# EAGLE board sparkfun-mlx90640-qwiic-breakout-Panel (EAGLE 9.0.1)
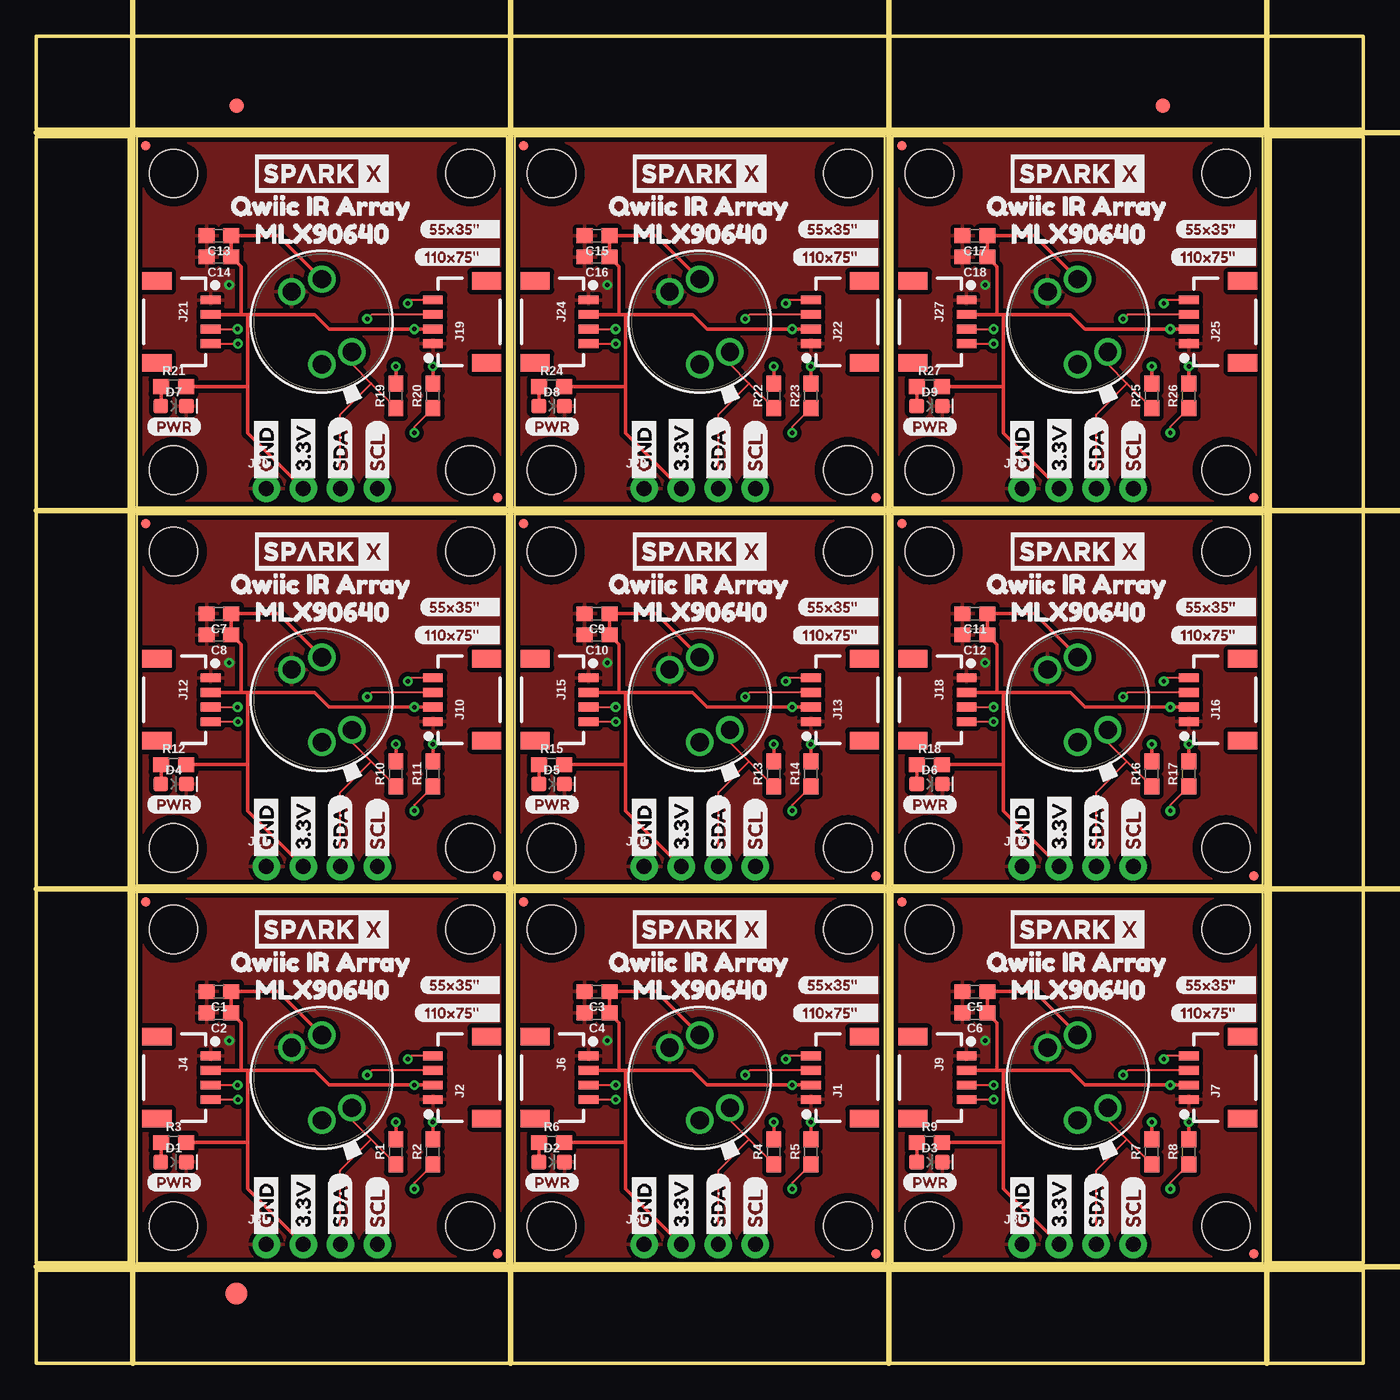
[diagram p0: board, top side]
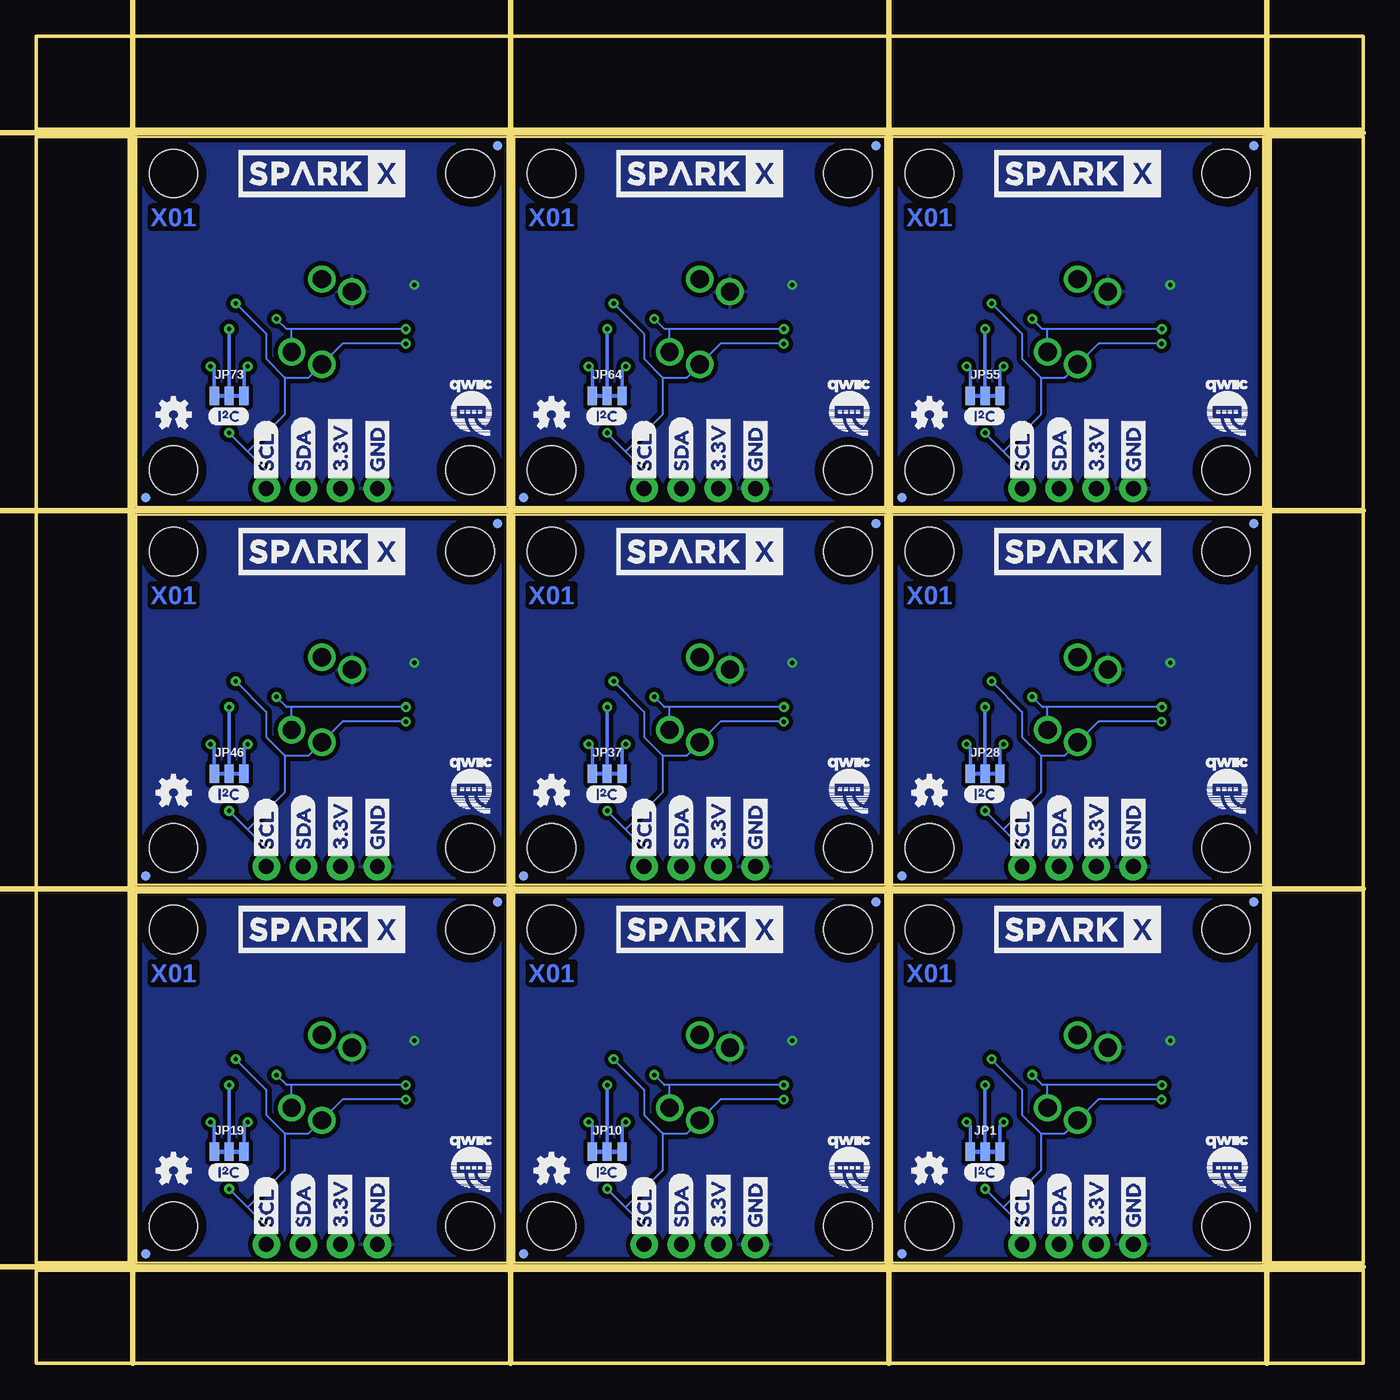
[diagram p1: board, bottom side, seen from below]

Size 90.93 x 90.93 mm. Coordinates in mm from the lower left corner, seen from the top.
Outline: 6.86,6.86 32.26,6.86 32.26,32.26 6.86,32.26 6.86,6.86
Outline: 32.77,6.86 58.17,6.86 58.17,32.26 32.77,32.26 32.77,6.86
Outline: 58.67,6.86 84.07,6.86 84.07,32.26 58.67,32.26 58.67,6.86
Outline: 6.86,32.77 32.26,32.77 32.26,58.17 6.86,58.17 6.86,32.77
Outline: 32.77,32.77 58.17,32.77 58.17,58.17 32.77,58.17 32.77,32.77
Outline: 58.67,32.77 84.07,32.77 84.07,58.17 58.67,58.17 58.67,32.77
Outline: 6.86,58.67 32.26,58.67 32.26,84.07 6.86,84.07 6.86,58.67
Outline: 32.77,58.67 58.17,58.67 58.17,84.07 32.77,84.07 32.77,58.67
Outline: 58.67,58.67 84.07,58.67 84.07,84.07 58.67,84.07 58.67,58.67
Outline: 0,6.35 90.93,6.35 90.93,0 0,0 0,6.35
Outline: 84.58,84.07 90.93,84.07 90.93,6.86 84.58,6.86 84.58,84.07
Outline: 0,90.93 90.93,90.93 90.93,84.58 0,84.58 0,90.93
Outline: 0,84.07 6.35,84.07 6.35,6.86 0,6.86 0,84.07
Copper layers (1*16): Top 0.035mm / dielectric 1.5mm / Bottom 0.035mm
Design rules "SparkFun-2-layer-PCBWay-LIMIT": minimum track width 6mil, minimum drill 0.3mm, track to track 6mil, track to pad 6mil, pad to pad 6mil, via to via 6mil, smd to smd 6mil, copper to edge 6mil, drill to drill 6mil, minimum pad ring 7mil, minimum via ring 7mil, stop-mask expansion 4mil, vias tented up to drill 25mil, thermal gap 10mil
Milling: 8 lines

## Footprints (pad centres in the part's own frame; a part is rotated, then mirrored left to right if it is on the bottom)
0603 = smd 1.1 x 1: 1 -0.85,0; 2 0.85,0
LED-0603 = smd 1 x 1: A -0.877,0; C 0.877,0
FIDUCIAL-1X2 = smd 1 x 1: 1 0,0
FIDUCIAL-1.5X3 = smd 1.5 x 1.5: 1 0,0
1X04_1MM_RA = smd 0.6 x 1.35: 1 -1.5,0; 2 -0.5,0; 3 0.5,0; 4 1.5,0 | smd 1.2 x 2: NC1 2.8,-3.675; NC2 -2.8,-3.675
1X04_NO_SILK = drill 1.016 pad 1.88: 1 0,0; 2 2.54,0; 3 5.08,0; 4 7.62,0
SMT-JUMPER_3_2-NC_TRACE_NO-SILK = smd 0.635 x 1.27: 1 -1.016,0; 2 0,0; 3 1.016,0
MICRO-FIDUCIAL = smd 0.635 x 0.635: 1 0,0
STAND-OFF = hole 3.302: 0,0
MLX90640 = drill 1.25: GND 2.065,2.065; SCL -2.92,0; SDA -2.065,-2.065; VDD 2.92,0

## Placement (x,y rotation side)
C1  0.1uF  [0603]  12.51,25.46 180 top
C2  1.0uF  [0603]  12.51,24 180 top
C3  0.1uF  [0603]  38.42,25.46 180 top
C4  1.0uF  [0603]  38.42,24 180 top
C5  0.1uF  [0603]  64.33,25.46 180 top
C6  1.0uF  [0603]  64.33,24 180 top
C7  0.1uF  [0603]  12.51,51.37 180 top
C8  1.0uF  [0603]  12.51,49.91 180 top
C9  0.1uF  [0603]  38.42,51.37 180 top
C10  1.0uF  [0603]  38.42,49.91 180 top
C11  0.1uF  [0603]  64.33,51.37 180 top
C12  1.0uF  [0603]  64.33,49.91 180 top
C13  0.1uF  [0603]  12.51,77.28 180 top
C14  1.0uF  [0603]  12.51,75.82 180 top
C15  0.1uF  [0603]  38.42,77.28 180 top
C16  1.0uF  [0603]  38.42,75.82 180 top
C17  0.1uF  [0603]  64.33,77.28 180 top
C18  1.0uF  [0603]  64.33,75.82 180 top
D1  RED  [LED-0603]  9.4,13.78 0 top
D2  RED  [LED-0603]  35.31,13.78 0 top
D3  RED  [LED-0603]  61.21,13.78 0 top
D4  RED  [LED-0603]  9.4,39.69 0 top
D5  RED  [LED-0603]  35.31,39.69 0 top
D6  RED  [LED-0603]  61.21,39.69 0 top
D7  RED  [LED-0603]  9.4,65.6 0 top
D8  RED  [LED-0603]  35.31,65.6 0 top
D9  RED  [LED-0603]  61.21,65.6 0 top
E$1  [FIDUCIAL-1X2]  13.72,86.17 0 top
E$2  [FIDUCIAL-1X2]  77.22,86.17 0 top
E$3  [FIDUCIAL-1.5X3]  13.72,4.76 0 top
J1  SMD  [1X04_1MM_RA]  53.09,19.56 90 top
J2  SMD  [1X04_1MM_RA]  27.18,19.56 90 top
J3  PTH  [1X04_NO_SILK]  15.75,8.13 0 top
J4  SMD  [1X04_1MM_RA]  11.94,19.56 270 top
J5  PTH  [1X04_NO_SILK]  41.66,8.13 0 top
J6  SMD  [1X04_1MM_RA]  37.85,19.56 270 top
J7  SMD  [1X04_1MM_RA]  78.99,19.56 90 top
J8  PTH  [1X04_NO_SILK]  67.56,8.13 0 top
J9  SMD  [1X04_1MM_RA]  63.75,19.56 270 top
J10  SMD  [1X04_1MM_RA]  27.18,45.47 90 top
J11  PTH  [1X04_NO_SILK]  15.75,34.04 0 top
J12  SMD  [1X04_1MM_RA]  11.94,45.47 270 top
J13  SMD  [1X04_1MM_RA]  53.09,45.47 90 top
J14  PTH  [1X04_NO_SILK]  41.66,34.04 0 top
J15  SMD  [1X04_1MM_RA]  37.85,45.47 270 top
J16  SMD  [1X04_1MM_RA]  78.99,45.47 90 top
J17  PTH  [1X04_NO_SILK]  67.56,34.04 0 top
J18  SMD  [1X04_1MM_RA]  63.75,45.47 270 top
J19  SMD  [1X04_1MM_RA]  27.18,71.37 90 top
J20  PTH  [1X04_NO_SILK]  15.75,59.94 0 top
J21  SMD  [1X04_1MM_RA]  11.94,71.37 270 top
J22  SMD  [1X04_1MM_RA]  53.09,71.37 90 top
J23  PTH  [1X04_NO_SILK]  41.66,59.94 0 top
J24  SMD  [1X04_1MM_RA]  37.85,71.37 270 top
J25  SMD  [1X04_1MM_RA]  78.99,71.37 90 top
J26  PTH  [1X04_NO_SILK]  67.56,59.94 0 top
J27  SMD  [1X04_1MM_RA]  63.75,71.37 270 top
JP1  I2C  [SMT-JUMPER_3_2-NC_TRACE_NO-SILK]  25.91,14.48 0 bottom
JP2  FIDUCIALUFIDUCIAL  [MICRO-FIDUCIAL]  31.62,7.49 0 top
JP3  STAND-OFF  [STAND-OFF]  9.4,29.72 0 top
JP4  STAND-OFF  [STAND-OFF]  29.72,29.72 0 top
JP5  FIDUCIALUFIDUCIAL  [MICRO-FIDUCIAL]  7.49,31.62 0 top
JP6  FIDUCIALUFIDUCIAL  [MICRO-FIDUCIAL]  31.62,7.49 0 bottom
JP7  FIDUCIALUFIDUCIAL  [MICRO-FIDUCIAL]  7.49,31.62 0 bottom
JP8  STAND-OFF  [STAND-OFF]  9.4,9.4 0 top
JP9  STAND-OFF  [STAND-OFF]  29.72,9.4 0 top
JP10  I2C  [SMT-JUMPER_3_2-NC_TRACE_NO-SILK]  51.82,14.48 0 bottom
JP11  STAND-OFF  [STAND-OFF]  35.31,29.72 0 top
JP12  STAND-OFF  [STAND-OFF]  55.63,29.72 0 top
JP13  FIDUCIALUFIDUCIAL  [MICRO-FIDUCIAL]  57.53,7.49 0 top
JP14  FIDUCIALUFIDUCIAL  [MICRO-FIDUCIAL]  57.53,7.49 0 bottom
JP15  FIDUCIALUFIDUCIAL  [MICRO-FIDUCIAL]  33.4,31.62 0 top
JP16  FIDUCIALUFIDUCIAL  [MICRO-FIDUCIAL]  33.4,31.62 0 bottom
JP17  STAND-OFF  [STAND-OFF]  35.31,9.4 0 top
JP18  STAND-OFF  [STAND-OFF]  55.63,9.4 0 top
JP19  I2C  [SMT-JUMPER_3_2-NC_TRACE_NO-SILK]  77.72,14.48 0 bottom
JP20  STAND-OFF  [STAND-OFF]  61.21,29.72 0 top
JP21  STAND-OFF  [STAND-OFF]  81.53,29.72 0 top
JP22  FIDUCIALUFIDUCIAL  [MICRO-FIDUCIAL]  83.44,7.49 0 top
JP23  FIDUCIALUFIDUCIAL  [MICRO-FIDUCIAL]  83.44,7.49 0 bottom
JP24  FIDUCIALUFIDUCIAL  [MICRO-FIDUCIAL]  59.31,31.62 0 top
JP25  FIDUCIALUFIDUCIAL  [MICRO-FIDUCIAL]  59.31,31.62 0 bottom
JP26  STAND-OFF  [STAND-OFF]  61.21,9.4 0 top
JP27  STAND-OFF  [STAND-OFF]  81.53,9.4 0 top
JP28  I2C  [SMT-JUMPER_3_2-NC_TRACE_NO-SILK]  25.91,40.39 0 bottom
JP29  STAND-OFF  [STAND-OFF]  9.4,55.63 0 top
JP30  STAND-OFF  [STAND-OFF]  29.72,55.63 0 top
JP31  FIDUCIALUFIDUCIAL  [MICRO-FIDUCIAL]  31.62,33.4 0 top
JP32  FIDUCIALUFIDUCIAL  [MICRO-FIDUCIAL]  31.62,33.4 0 bottom
JP33  FIDUCIALUFIDUCIAL  [MICRO-FIDUCIAL]  7.49,57.53 0 top
JP34  FIDUCIALUFIDUCIAL  [MICRO-FIDUCIAL]  7.49,57.53 0 bottom
JP35  STAND-OFF  [STAND-OFF]  9.4,35.31 0 top
JP36  STAND-OFF  [STAND-OFF]  29.72,35.31 0 top
JP37  I2C  [SMT-JUMPER_3_2-NC_TRACE_NO-SILK]  51.82,40.39 0 bottom
JP38  STAND-OFF  [STAND-OFF]  35.31,55.63 0 top
JP39  STAND-OFF  [STAND-OFF]  55.63,55.63 0 top
JP40  FIDUCIALUFIDUCIAL  [MICRO-FIDUCIAL]  57.53,33.4 0 top
JP41  FIDUCIALUFIDUCIAL  [MICRO-FIDUCIAL]  57.53,33.4 0 bottom
JP42  FIDUCIALUFIDUCIAL  [MICRO-FIDUCIAL]  33.4,57.53 0 top
JP43  FIDUCIALUFIDUCIAL  [MICRO-FIDUCIAL]  33.4,57.53 0 bottom
JP44  STAND-OFF  [STAND-OFF]  35.31,35.31 0 top
JP45  STAND-OFF  [STAND-OFF]  55.63,35.31 0 top
JP46  I2C  [SMT-JUMPER_3_2-NC_TRACE_NO-SILK]  77.72,40.39 0 bottom
JP47  STAND-OFF  [STAND-OFF]  61.21,55.63 0 top
JP48  STAND-OFF  [STAND-OFF]  81.53,55.63 0 top
JP49  FIDUCIALUFIDUCIAL  [MICRO-FIDUCIAL]  83.44,33.4 0 top
JP50  FIDUCIALUFIDUCIAL  [MICRO-FIDUCIAL]  83.44,33.4 0 bottom
JP51  FIDUCIALUFIDUCIAL  [MICRO-FIDUCIAL]  59.31,57.53 0 top
JP52  FIDUCIALUFIDUCIAL  [MICRO-FIDUCIAL]  59.31,57.53 0 bottom
JP53  STAND-OFF  [STAND-OFF]  61.21,35.31 0 top
JP54  STAND-OFF  [STAND-OFF]  81.53,35.31 0 top
JP55  I2C  [SMT-JUMPER_3_2-NC_TRACE_NO-SILK]  25.91,66.29 0 bottom
JP56  STAND-OFF  [STAND-OFF]  9.4,81.53 0 top
JP57  STAND-OFF  [STAND-OFF]  29.72,81.53 0 top
JP58  FIDUCIALUFIDUCIAL  [MICRO-FIDUCIAL]  31.62,59.31 0 top
JP59  FIDUCIALUFIDUCIAL  [MICRO-FIDUCIAL]  31.62,59.31 0 bottom
JP60  FIDUCIALUFIDUCIAL  [MICRO-FIDUCIAL]  7.49,83.44 0 top
JP61  FIDUCIALUFIDUCIAL  [MICRO-FIDUCIAL]  7.49,83.44 0 bottom
JP62  STAND-OFF  [STAND-OFF]  9.4,61.21 0 top
JP63  STAND-OFF  [STAND-OFF]  29.72,61.21 0 top
JP64  I2C  [SMT-JUMPER_3_2-NC_TRACE_NO-SILK]  51.82,66.29 0 bottom
JP65  STAND-OFF  [STAND-OFF]  35.31,81.53 0 top
JP66  STAND-OFF  [STAND-OFF]  55.63,81.53 0 top
JP67  FIDUCIALUFIDUCIAL  [MICRO-FIDUCIAL]  57.53,59.31 0 top
JP68  FIDUCIALUFIDUCIAL  [MICRO-FIDUCIAL]  57.53,59.31 0 bottom
JP69  FIDUCIALUFIDUCIAL  [MICRO-FIDUCIAL]  33.4,83.44 0 top
JP70  FIDUCIALUFIDUCIAL  [MICRO-FIDUCIAL]  33.4,83.44 0 bottom
JP71  STAND-OFF  [STAND-OFF]  35.31,61.21 0 top
JP72  STAND-OFF  [STAND-OFF]  55.63,61.21 0 top
JP73  I2C  [SMT-JUMPER_3_2-NC_TRACE_NO-SILK]  77.72,66.29 0 bottom
JP74  STAND-OFF  [STAND-OFF]  61.21,81.53 0 top
JP75  STAND-OFF  [STAND-OFF]  81.53,81.53 0 top
JP76  FIDUCIALUFIDUCIAL  [MICRO-FIDUCIAL]  83.44,59.31 0 top
JP77  FIDUCIALUFIDUCIAL  [MICRO-FIDUCIAL]  83.44,59.31 0 bottom
JP78  FIDUCIALUFIDUCIAL  [MICRO-FIDUCIAL]  59.31,83.44 0 top
JP79  FIDUCIALUFIDUCIAL  [MICRO-FIDUCIAL]  59.31,83.44 0 bottom
JP80  STAND-OFF  [STAND-OFF]  61.21,61.21 0 top
JP81  STAND-OFF  [STAND-OFF]  81.53,61.21 0 top
LOGO1  OSHW-LOGOMINI  [OSHW-LOGO-MINI]  29.72,13.21 0 bottom
LOGO2  OSHW-LOGOMINI  [OSHW-LOGO-MINI]  55.63,13.21 0 bottom
LOGO3  OSHW-LOGOMINI  [OSHW-LOGO-MINI]  81.53,13.21 0 bottom
LOGO4  OSHW-LOGOMINI  [OSHW-LOGO-MINI]  29.72,39.12 0 bottom
LOGO5  OSHW-LOGOMINI  [OSHW-LOGO-MINI]  55.63,39.12 0 bottom
LOGO6  OSHW-LOGOMINI  [OSHW-LOGO-MINI]  81.53,39.12 0 bottom
LOGO7  OSHW-LOGOMINI  [OSHW-LOGO-MINI]  29.72,65.02 0 bottom
LOGO8  OSHW-LOGOMINI  [OSHW-LOGO-MINI]  55.63,65.02 0 bottom
LOGO9  OSHW-LOGOMINI  [OSHW-LOGO-MINI]  81.53,65.02 0 bottom
R1  2.2k  [0603]  24.64,14.48 90 top
R2  2.2k  [0603]  27.18,14.48 90 top
R3  1k  [0603]  9.4,15.11 0 top
R4  2.2k  [0603]  50.55,14.48 90 top
R5  2.2k  [0603]  53.09,14.48 90 top
R6  1k  [0603]  35.31,15.11 0 top
R7  2.2k  [0603]  76.45,14.48 90 top
R8  2.2k  [0603]  78.99,14.48 90 top
R9  1k  [0603]  61.21,15.11 0 top
R10  2.2k  [0603]  24.64,40.39 90 top
R11  2.2k  [0603]  27.18,40.39 90 top
R12  1k  [0603]  9.4,41.02 0 top
R13  2.2k  [0603]  50.55,40.39 90 top
R14  2.2k  [0603]  53.09,40.39 90 top
R15  1k  [0603]  35.31,41.02 0 top
R16  2.2k  [0603]  76.45,40.39 90 top
R17  2.2k  [0603]  78.99,40.39 90 top
R18  1k  [0603]  61.21,41.02 0 top
R19  2.2k  [0603]  24.64,66.29 90 top
R20  2.2k  [0603]  27.18,66.29 90 top
R21  1k  [0603]  9.4,66.93 0 top
R22  2.2k  [0603]  50.55,66.29 90 top
R23  2.2k  [0603]  53.09,66.29 90 top
R24  1k  [0603]  35.31,66.93 0 top
R25  2.2k  [0603]  76.45,66.29 90 top
R26  2.2k  [0603]  78.99,66.29 90 top
R27  1k  [0603]  61.21,66.93 0 top
U1  MLX90640  [MLX90640]  19.56,19.56 90 top
U2  MLX90640  [MLX90640]  45.47,19.56 90 top
U3  MLX90640  [MLX90640]  71.37,19.56 90 top
U4  MLX90640  [MLX90640]  19.56,45.47 90 top
U5  MLX90640  [MLX90640]  45.47,45.47 90 top
U6  MLX90640  [MLX90640]  71.37,45.47 90 top
U7  MLX90640  [MLX90640]  19.56,71.37 90 top
U8  MLX90640  [MLX90640]  45.47,71.37 90 top
U9  MLX90640  [MLX90640]  71.37,71.37 90 top
U$1  [SDA-[)]  20.83,8.38 90 top
U$2  SPARKX-LOGO5  [SPARKX-LARGE]  19.56,29.72 0 bottom
U$3  SPARKX-LOGO4  [SPARKX-MEDIUM]  19.56,29.72 0 top
U$4  [SCL-[)]  23.37,8.38 90 top
U$5  [3.3V]  18.29,8.38 90 top
U$6  [GND-04]  15.75,8.38 90 top
U$7  [SDA-[)]  20.83,8.38 90 bottom
U$8  [SCL-[)]  23.37,8.38 90 bottom
U$9  [3.3V]  18.29,8.38 90 bottom
U$10  [GND-04]  15.75,8.38 90 bottom
U$11  [QWIIC-LOGO-SMALL]  9.4,13.65 0 bottom
U$12  [PWR-()-03]  7.56,12.38 0 top
U$13  [MLX906401]  13.84,25.59 0 top
U$14  [QWIIC_IR_ARRAY0]  12.19,27.5 0 top
U$15  [55X35#____3]  26.24,25.91 0 top
U$16  [I_SUPER2_C-()-03]  27.37,13.08 0 bottom
U$17  [110X75#____4]  25.91,24 0 top
U$18  SPARKX-LOGO5  [SPARKX-LARGE]  45.47,29.72 0 bottom
U$19  SPARKX-LOGO4  [SPARKX-MEDIUM]  45.47,29.72 0 top
U$20  [SDA-[)]  46.74,8.38 90 top
U$21  [SCL-[)]  49.28,8.38 90 top
U$22  [3.3V]  44.2,8.38 90 top
U$23  [GND-04]  41.66,8.38 90 top
U$24  [SDA-[)]  46.74,8.38 90 bottom
U$25  [SCL-[)]  49.28,8.38 90 bottom
U$26  [3.3V]  44.2,8.38 90 bottom
U$27  [GND-04]  41.66,8.38 90 bottom
U$28  [QWIIC-LOGO-SMALL]  35.31,13.65 0 bottom
U$29  [PWR-()-03]  33.46,12.38 0 top
U$30  [MLX906401]  39.75,25.59 0 top
U$31  [QWIIC_IR_ARRAY0]  38.1,27.5 0 top
U$32  [I_SUPER2_C-()-03]  53.28,13.08 0 bottom
U$33  [55X35#____3]  52.15,25.91 0 top
U$34  [110X75#____4]  51.82,24 0 top
U$35  SPARKX-LOGO5  [SPARKX-LARGE]  71.37,29.72 0 bottom
U$36  SPARKX-LOGO4  [SPARKX-MEDIUM]  71.37,29.72 0 top
U$37  [SDA-[)]  72.64,8.38 90 top
U$38  [SCL-[)]  75.18,8.38 90 top
U$39  [3.3V]  70.1,8.38 90 top
U$40  [GND-04]  67.56,8.38 90 top
U$41  [SDA-[)]  72.64,8.38 90 bottom
U$42  [SCL-[)]  75.18,8.38 90 bottom
U$43  [3.3V]  70.1,8.38 90 bottom
U$44  [GND-04]  67.56,8.38 90 bottom
U$45  [QWIIC-LOGO-SMALL]  61.21,13.65 0 bottom
U$46  [PWR-()-03]  59.37,12.38 0 top
U$47  [MLX906401]  65.66,25.59 0 top
U$48  [QWIIC_IR_ARRAY0]  64.01,27.5 0 top
U$49  [I_SUPER2_C-()-03]  79.18,13.08 0 bottom
U$50  [55X35#____3]  78.05,25.91 0 top
U$51  [110X75#____4]  77.72,24 0 top
U$52  SPARKX-LOGO5  [SPARKX-LARGE]  19.56,55.63 0 bottom
U$53  SPARKX-LOGO4  [SPARKX-MEDIUM]  19.56,55.63 0 top
U$54  [SDA-[)]  20.83,34.29 90 top
U$55  [SCL-[)]  23.37,34.29 90 top
U$56  [3.3V]  18.29,34.29 90 top
U$57  [GND-04]  15.75,34.29 90 top
U$58  [SDA-[)]  20.83,34.29 90 bottom
U$59  [SCL-[)]  23.37,34.29 90 bottom
U$60  [3.3V]  18.29,34.29 90 bottom
U$61  [GND-04]  15.75,34.29 90 bottom
U$62  [QWIIC-LOGO-SMALL]  9.4,39.56 0 bottom
U$63  [PWR-()-03]  7.56,38.29 0 top
U$64  [MLX906401]  13.84,51.5 0 top
U$65  [QWIIC_IR_ARRAY0]  12.19,53.4 0 top
U$66  [I_SUPER2_C-()-03]  27.37,38.99 0 bottom
U$67  [55X35#____3]  26.24,51.82 0 top
U$68  [110X75#____4]  25.91,49.91 0 top
U$69  SPARKX-LOGO5  [SPARKX-LARGE]  45.47,55.63 0 bottom
U$70  SPARKX-LOGO4  [SPARKX-MEDIUM]  45.47,55.63 0 top
U$71  [SDA-[)]  46.74,34.29 90 top
U$72  [SCL-[)]  49.28,34.29 90 top
U$73  [3.3V]  44.2,34.29 90 top
U$74  [GND-04]  41.66,34.29 90 top
U$75  [SDA-[)]  46.74,34.29 90 bottom
U$76  [SCL-[)]  49.28,34.29 90 bottom
U$77  [3.3V]  44.2,34.29 90 bottom
U$78  [GND-04]  41.66,34.29 90 bottom
U$79  [QWIIC-LOGO-SMALL]  35.31,39.56 0 bottom
U$80  [PWR-()-03]  33.46,38.29 0 top
U$81  [MLX906401]  39.75,51.5 0 top
U$82  [QWIIC_IR_ARRAY0]  38.1,53.4 0 top
U$83  [I_SUPER2_C-()-03]  53.28,38.99 0 bottom
U$84  [55X35#____3]  52.15,51.82 0 top
U$85  [110X75#____4]  51.82,49.91 0 top
U$86  SPARKX-LOGO5  [SPARKX-LARGE]  71.37,55.63 0 bottom
U$87  SPARKX-LOGO4  [SPARKX-MEDIUM]  71.37,55.63 0 top
U$88  [SDA-[)]  72.64,34.29 90 top
U$89  [SCL-[)]  75.18,34.29 90 top
U$90  [3.3V]  70.1,34.29 90 top
U$91  [GND-04]  67.56,34.29 90 top
U$92  [SDA-[)]  72.64,34.29 90 bottom
U$93  [SCL-[)]  75.18,34.29 90 bottom
U$94  [3.3V]  70.1,34.29 90 bottom
U$95  [GND-04]  67.56,34.29 90 bottom
U$96  [QWIIC-LOGO-SMALL]  61.21,39.56 0 bottom
U$97  [PWR-()-03]  59.37,38.29 0 top
U$98  [MLX906401]  65.66,51.5 0 top
U$99  [QWIIC_IR_ARRAY0]  64.01,53.4 0 top
U$100  [I_SUPER2_C-()-03]  79.18,38.99 0 bottom
U$101  [55X35#____3]  78.05,51.82 0 top
U$102  [110X75#____4]  77.72,49.91 0 top
U$103  SPARKX-LOGO5  [SPARKX-LARGE]  19.56,81.53 0 bottom
U$104  SPARKX-LOGO4  [SPARKX-MEDIUM]  19.56,81.53 0 top
U$105  [SDA-[)]  20.83,60.2 90 top
U$106  [SCL-[)]  23.37,60.2 90 top
U$107  [3.3V]  18.29,60.2 90 top
U$108  [GND-04]  15.75,60.2 90 top
U$109  [SDA-[)]  20.83,60.2 90 bottom
U$110  [SCL-[)]  23.37,60.2 90 bottom
U$111  [3.3V]  18.29,60.2 90 bottom
U$112  [GND-04]  15.75,60.2 90 bottom
U$113  [QWIIC-LOGO-SMALL]  9.4,65.47 0 bottom
U$114  [PWR-()-03]  7.56,64.2 0 top
U$115  [MLX906401]  13.84,77.41 0 top
U$116  [QWIIC_IR_ARRAY0]  12.19,79.31 0 top
U$117  [I_SUPER2_C-()-03]  27.37,64.9 0 bottom
U$118  [55X35#____3]  26.24,77.72 0 top
U$119  [110X75#____4]  25.91,75.82 0 top
U$120  SPARKX-LOGO5  [SPARKX-LARGE]  45.47,81.53 0 bottom
U$121  SPARKX-LOGO4  [SPARKX-MEDIUM]  45.47,81.53 0 top
U$122  [SDA-[)]  46.74,60.2 90 top
U$123  [SCL-[)]  49.28,60.2 90 top
U$124  [3.3V]  44.2,60.2 90 top
U$125  [GND-04]  41.66,60.2 90 top
U$126  [SDA-[)]  46.74,60.2 90 bottom
U$127  [SCL-[)]  49.28,60.2 90 bottom
U$128  [3.3V]  44.2,60.2 90 bottom
U$129  [GND-04]  41.66,60.2 90 bottom
U$130  [QWIIC-LOGO-SMALL]  35.31,65.47 0 bottom
U$131  [PWR-()-03]  33.46,64.2 0 top
U$132  [MLX906401]  39.75,77.41 0 top
U$133  [QWIIC_IR_ARRAY0]  38.1,79.31 0 top
U$134  [I_SUPER2_C-()-03]  53.28,64.9 0 bottom
U$135  [55X35#____3]  52.15,77.72 0 top
U$136  [110X75#____4]  51.82,75.82 0 top
U$137  SPARKX-LOGO5  [SPARKX-LARGE]  71.37,81.53 0 bottom
U$138  SPARKX-LOGO4  [SPARKX-MEDIUM]  71.37,81.53 0 top
U$139  [SDA-[)]  72.64,60.2 90 top
U$140  [SCL-[)]  75.18,60.2 90 top
U$141  [3.3V]  70.1,60.2 90 top
U$142  [GND-04]  67.56,60.2 90 top
U$143  [SDA-[)]  72.64,60.2 90 bottom
U$144  [SCL-[)]  75.18,60.2 90 bottom
U$145  [3.3V]  70.1,60.2 90 bottom
U$146  [GND-04]  67.56,60.2 90 bottom
U$147  [QWIIC-LOGO-SMALL]  61.21,65.47 0 bottom
U$148  [PWR-()-03]  59.37,64.2 0 top
U$149  [MLX906401]  65.66,77.41 0 top
U$150  [QWIIC_IR_ARRAY0]  64.01,79.31 0 top
U$151  [I_SUPER2_C-()-03]  79.18,64.9 0 bottom
U$152  [55X35#____3]  78.05,77.72 0 top
U$153  [110X75#____4]  77.72,75.82 0 top

## Library data of the parts
C1 C3 C5 C7 C9 C11 C13 C15 C17 = SparkFun-Capacitors; PROD_ID: CAP-00810
C2 C4 C6 C8 C10 C12 C14 C16 C18 = SparkFun-Capacitors; PROD_ID: CAP-00868
D1-D9 = SparkFun-LED; PROD_ID: DIO-00819
E$1 E$2 LOGO1-LOGO9 = SparkFun-Aesthetics
E$3 = SparkFun-Retired
J1-J27 U$2 U$3 U$18 U$19 U$35 U$36 U$52 U$53 U$69 U$70 U$86 U$87 U$103 U$104 U$120 U$121 U$137 U$138 = SparkX
JP1 JP10 JP19 JP28 JP37 JP46 JP55 JP64 JP73 = SparkFun-Jumpers
JP2-JP9 JP11-JP18 JP20-JP27 JP29-JP36 JP38-JP45 JP47-JP54 JP56-JP63 JP65-JP72 JP74-JP81 = SparkFun
R1 R2 R4 R5 R7 R8 R10 R11 R13 R14 R16 R17 R19 R20 R22 R23 R25 R26 = SparkFun-Resistors; PROD_ID: RES-08272
R3 R6 R9 R12 R15 R18 R21 R24 R27 = SparkFun-Resistors; PROD_ID: RES-07856
U1-U9 = MLX90540
U$1 U$4-U$12 U$16 U$20-U$29 U$32 U$37-U$46 U$49 U$54-U$63 U$66 U$71-U$80 U$83 U$88-U$97 U$100 U$105-U$114 U$117 U$122-U$131 U$134 U$139-U$148 U$151 = Labels
U$13-U$15 U$17 U$30 U$31 U$33 U$34 U$47 U$48 U$50 U$51 U$64 U$65 U$67 U$68 U$81 U$82 U$84 U$85 U$98 U$99 U$101 U$102 U$115 U$116 U$118 U$119 U$132 U$133 U$135 U$136 U$149 U$150 U$152 U$153 = buzzard_labels

## Nets
3.3V: C1.1 C2.1 J2.2 J3.2 J4.2 JP1.2 R3.2 U1.VDD
3.3V1: C3.1 C4.1 J1.2 J5.2 J6.2 JP10.2 R6.2 U2.VDD
3.3V2: C5.1 C6.1 J7.2 J8.2 J9.2 JP19.2 R9.2 U3.VDD
3.3V3: C7.1 C8.1 J10.2 J11.2 J12.2 JP28.2 R12.2 U4.VDD
3.3V4: C9.1 C10.1 J13.2 J14.2 J15.2 JP37.2 R15.2 U5.VDD
3.3V5: C11.1 C12.1 J16.2 J17.2 J18.2 JP46.2 R18.2 U6.VDD
3.3V6: C13.1 C14.1 J19.2 J20.2 J21.2 JP55.2 R21.2 U7.VDD
3.3V7: C15.1 C16.1 J22.2 J23.2 J24.2 JP64.2 R24.2 U8.VDD
3.3V8: C17.1 C18.1 J25.2 J26.2 J27.2 JP73.2 R27.2 U9.VDD
GND: C1.2 C2.2 D1.C J2.1 J3.1 J4.1 U1.GND
GND1: C3.2 C4.2 D2.C J1.1 J5.1 J6.1 U2.GND
GND2: C5.2 C6.2 D3.C J7.1 J8.1 J9.1 U3.GND
GND3: C7.2 C8.2 D4.C J10.1 J11.1 J12.1 U4.GND
GND4: C9.2 C10.2 D5.C J13.1 J14.1 J15.1 U5.GND
GND5: C11.2 C12.2 D6.C J16.1 J17.1 J18.1 U6.GND
GND6: C13.2 C14.2 D7.C J19.1 J20.1 J21.1 U7.GND
GND7: C15.2 C16.2 D8.C J22.1 J23.1 J24.1 U8.GND
GND8: C17.2 C18.2 D9.C J25.1 J26.1 J27.1 U9.GND
N$1: JP1.3 R1.2
N$2: JP1.1 R2.2
N$3: D1.A R3.1
N$4: JP10.3 R4.2
N$5: JP10.1 R5.2
N$6: D2.A R6.1
N$7: JP19.3 R7.2
N$8: JP19.1 R8.2
N$9: D3.A R9.1
N$10: JP28.3 R10.2
N$11: JP28.1 R11.2
N$12: D4.A R12.1
N$13: JP37.3 R13.2
N$14: JP37.1 R14.2
N$15: D5.A R15.1
N$16: JP46.3 R16.2
N$17: JP46.1 R17.2
N$18: D6.A R18.1
N$19: JP55.3 R19.2
N$20: JP55.1 R20.2
N$21: D7.A R21.1
N$22: JP64.3 R22.2
N$23: JP64.1 R23.2
N$24: D8.A R24.1
N$25: JP73.3 R25.2
N$26: JP73.1 R26.2
N$27: D9.A R27.1
SCL: J2.4 J3.4 J4.4 R2.1 U1.SCL
SCL1: J1.4 J5.4 J6.4 R5.1 U2.SCL
SCL2: J7.4 J8.4 J9.4 R8.1 U3.SCL
SCL3: J10.4 J11.4 J12.4 R11.1 U4.SCL
SCL4: J13.4 J14.4 J15.4 R14.1 U5.SCL
SCL5: J16.4 J17.4 J18.4 R17.1 U6.SCL
SCL6: J19.4 J20.4 J21.4 R20.1 U7.SCL
SCL7: J22.4 J23.4 J24.4 R23.1 U8.SCL
SCL8: J25.4 J26.4 J27.4 R26.1 U9.SCL
SDA: J2.3 J3.3 J4.3 R1.1 U1.SDA
SDA1: J1.3 J5.3 J6.3 R4.1 U2.SDA
SDA2: J7.3 J8.3 J9.3 R7.1 U3.SDA
SDA3: J10.3 J11.3 J12.3 R10.1 U4.SDA
SDA4: J13.3 J14.3 J15.3 R13.1 U5.SDA
SDA5: J16.3 J17.3 J18.3 R16.1 U6.SDA
SDA6: J19.3 J20.3 J21.3 R19.1 U7.SDA
SDA7: J22.3 J23.3 J24.3 R22.1 U8.SDA
SDA8: J25.3 J26.3 J27.3 R25.1 U9.SDA

## Tracks (layer width: path | path; a pad name or v marks a point on that pad's centre or on a via)
3.3V  (via drill 0.3)
  Top 0.254: J4.2 14.03,20.06 | 14.03,20.06 14.48,20.06 | 14.48,20.06 19.06,20.06 20.06,19.06 v25.91,19.06 J2.2 | J3.2 14.48,11.94 14.48,15.11 | 14.48,15.11 14.48,20.06 | R3.2 14.48,15.11 | 14.03,20.06 14.03,23.33 C2.1 C1.1 16.57,25.46 U1.VDD
  Bottom 0.254: JP1.2 v25.91,19.06
3.3V1  (via drill 0.3)
  Top 0.254: J6.2 39.94,20.06 | 39.94,20.06 40.39,20.06 | 40.39,20.06 44.97,20.06 45.97,19.06 v51.82,19.06 J1.2 | J5.2 40.39,11.94 40.39,15.11 | 40.39,15.11 40.39,20.06 | R6.2 40.39,15.11 | 39.94,20.06 39.94,23.33 C4.1 C3.1 42.48,25.46 U2.VDD
  Bottom 0.254: JP10.2 v51.82,19.06
3.3V2  (via drill 0.3)
  Top 0.254: J9.2 65.85,20.06 | 65.85,20.06 66.29,20.06 | 66.29,20.06 70.87,20.06 71.87,19.06 v77.72,19.06 J7.2 | J8.2 66.29,11.94 66.29,15.11 | 66.29,15.11 66.29,20.06 | R9.2 66.29,15.11 | 65.85,20.06 65.85,23.33 C6.1 C5.1 68.39,25.46 U3.VDD
  Bottom 0.254: JP19.2 v77.72,19.06
3.3V3  (via drill 0.3)
  Top 0.254: J12.2 14.03,45.97 | 14.03,45.97 14.48,45.97 | 14.48,45.97 19.06,45.97 20.06,44.97 v25.91,44.97 J10.2 | J11.2 14.48,37.85 14.48,41.02 | 14.48,41.02 14.48,45.97 | R12.2 14.48,41.02 | 14.03,45.97 14.03,49.24 C8.1 C7.1 16.57,51.37 U4.VDD
  Bottom 0.254: JP28.2 v25.91,44.97
3.3V4  (via drill 0.3)
  Top 0.254: J15.2 39.94,45.97 | 39.94,45.97 40.39,45.97 | 40.39,45.97 44.97,45.97 45.97,44.97 v51.82,44.97 J13.2 | J14.2 40.39,37.85 40.39,41.02 | 40.39,41.02 40.39,45.97 | R15.2 40.39,41.02 | 39.94,45.97 39.94,49.24 C10.1 C9.1 42.48,51.37 U5.VDD
  Bottom 0.254: JP37.2 v51.82,44.97
3.3V5  (via drill 0.3)
  Top 0.254: J18.2 65.85,45.97 | 65.85,45.97 66.29,45.97 | 66.29,45.97 70.87,45.97 71.87,44.97 v77.72,44.97 J16.2 | J17.2 66.29,37.85 66.29,41.02 | 66.29,41.02 66.29,45.97 | R18.2 66.29,41.02 | 65.85,45.97 65.85,49.24 C12.1 C11.1 68.39,51.37 U6.VDD
  Bottom 0.254: JP46.2 v77.72,44.97
3.3V6  (via drill 0.3)
  Top 0.254: J21.2 14.03,71.87 | 14.03,71.87 14.48,71.87 | 14.48,71.87 19.06,71.87 20.06,70.87 v25.91,70.87 J19.2 | J20.2 14.48,63.75 14.48,66.93 | 14.48,66.93 14.48,71.87 | R21.2 14.48,66.93 | 14.03,71.87 14.03,75.15 C14.1 C13.1 16.57,77.28 U7.VDD
  Bottom 0.254: JP55.2 v25.91,70.87
3.3V7  (via drill 0.3)
  Top 0.254: J24.2 39.94,71.87 | 39.94,71.87 40.39,71.87 | 40.39,71.87 44.97,71.87 45.97,70.87 v51.82,70.87 J22.2 | J23.2 40.39,63.75 40.39,66.93 | 40.39,66.93 40.39,71.87 | R24.2 40.39,66.93 | 39.94,71.87 39.94,75.15 C16.1 C15.1 42.48,77.28 U8.VDD
  Bottom 0.254: JP64.2 v51.82,70.87
3.3V8  (via drill 0.3)
  Top 0.254: J27.2 65.85,71.87 | 65.85,71.87 66.29,71.87 | 66.29,71.87 70.87,71.87 71.87,70.87 v77.72,70.87 J25.2 | J26.2 66.29,63.75 66.29,66.93 | 66.29,66.93 66.29,71.87 | R27.2 66.29,66.93 | 65.85,71.87 65.85,75.15 C18.1 C17.1 68.39,77.28 U9.VDD
  Bottom 0.254: JP73.2 v77.72,70.87
GND  (via drill 0.3)
  other vias: 13.21,22.1
  pour Top (isolate 0.305): 6.86,6.86 6.86,32.26 32.26,32.26 32.26,6.86
  pour Bottom (isolate 0.305): 6.86,6.86 6.86,32.26 32.26,32.26 32.26,6.86
GND1  (via drill 0.3)
  other vias: 39.12,22.1
  pour Top (isolate 0.305): 32.77,6.86 32.77,32.26 58.17,32.26 58.17,6.86
  pour Bottom (isolate 0.305): 32.77,6.86 32.77,32.26 58.17,32.26 58.17,6.86
GND2  (via drill 0.3)
  other vias: 65.02,22.1
  pour Top (isolate 0.305): 58.67,6.86 58.67,32.26 84.07,32.26 84.07,6.86
  pour Bottom (isolate 0.305): 58.67,6.86 58.67,32.26 84.07,32.26 84.07,6.86
GND3  (via drill 0.3)
  other vias: 13.21,48.01
  pour Top (isolate 0.305): 6.86,32.77 6.86,58.17 32.26,58.17 32.26,32.77
  pour Bottom (isolate 0.305): 6.86,32.77 6.86,58.17 32.26,58.17 32.26,32.77
GND4  (via drill 0.3)
  other vias: 39.12,48.01
  pour Top (isolate 0.305): 32.77,32.77 32.77,58.17 58.17,58.17 58.17,32.77
  pour Bottom (isolate 0.305): 32.77,32.77 32.77,58.17 58.17,58.17 58.17,32.77
GND5  (via drill 0.3)
  other vias: 65.02,48.01
  pour Top (isolate 0.305): 58.67,32.77 58.67,58.17 84.07,58.17 84.07,32.77
  pour Bottom (isolate 0.305): 58.67,32.77 58.67,58.17 84.07,58.17 84.07,32.77
GND6  (via drill 0.3)
  other vias: 13.21,73.91
  pour Top (isolate 0.305): 6.86,58.67 6.86,84.07 32.26,84.07 32.26,58.67
  pour Bottom (isolate 0.305): 6.86,58.67 6.86,84.07 32.26,84.07 32.26,58.67
GND7  (via drill 0.3)
  other vias: 39.12,73.91
  pour Top (isolate 0.305): 32.77,58.67 32.77,84.07 58.17,84.07 58.17,58.67
  pour Bottom (isolate 0.305): 32.77,58.67 32.77,84.07 58.17,84.07 58.17,58.67
GND8  (via drill 0.3)
  other vias: 65.02,73.91
  pour Top (isolate 0.305): 58.67,58.67 58.67,84.07 84.07,84.07 84.07,58.67
  pour Bottom (isolate 0.305): 58.67,58.67 58.67,84.07 84.07,84.07 84.07,58.67
N$1  (via drill 0.3)
  Top 0.254: R1.2 v24.64,16.51
  Bottom 0.254: v24.64,16.51 24.89,16.26 JP1.3
N$2  (via drill 0.3)
  Top 0.254: R2.2 v27.18,16.51
  Bottom 0.254: v27.18,16.51 26.92,16.26 JP1.1
N$3
  Top 0.254: D1.A 8.55,13.81 R3.1
N$4  (via drill 0.3)
  Top 0.254: R4.2 v50.55,16.51
  Bottom 0.254: v50.55,16.51 50.8,16.26 JP10.3
N$5  (via drill 0.3)
  Top 0.254: R5.2 v53.09,16.51
  Bottom 0.254: v53.09,16.51 52.83,16.26 JP10.1
N$6
  Top 0.254: D2.A 34.46,13.81 R6.1
N$7  (via drill 0.3)
  Top 0.254: R7.2 v76.45,16.51
  Bottom 0.254: v76.45,16.51 76.71,16.26 JP19.3
N$8  (via drill 0.3)
  Top 0.254: R8.2 v78.99,16.51
  Bottom 0.254: v78.99,16.51 78.74,16.26 JP19.1
N$9
  Top 0.254: D3.A 60.36,13.81 R9.1
N$10  (via drill 0.3)
  Top 0.254: R10.2 v24.64,42.42
  Bottom 0.254: v24.64,42.42 24.89,42.16 JP28.3
N$11  (via drill 0.3)
  Top 0.254: R11.2 v27.18,42.42
  Bottom 0.254: v27.18,42.42 26.92,42.16 JP28.1
N$12
  Top 0.254: D4.A 8.55,39.71 R12.1
N$13  (via drill 0.3)
  Top 0.254: R13.2 v50.55,42.42
  Bottom 0.254: v50.55,42.42 50.8,42.16 JP37.3
N$14  (via drill 0.3)
  Top 0.254: R14.2 v53.09,42.42
  Bottom 0.254: v53.09,42.42 52.83,42.16 JP37.1
N$15
  Top 0.254: D5.A 34.46,39.71 R15.1
N$16  (via drill 0.3)
  Top 0.254: R16.2 v76.45,42.42
  Bottom 0.254: v76.45,42.42 76.71,42.16 JP46.3
N$17  (via drill 0.3)
  Top 0.254: R17.2 v78.99,42.42
  Bottom 0.254: v78.99,42.42 78.74,42.16 JP46.1
N$18
  Top 0.254: D6.A 60.36,39.71 R18.1
N$19  (via drill 0.3)
  Top 0.254: R19.2 v24.64,68.33
  Bottom 0.254: v24.64,68.33 24.89,68.07 JP55.3
N$20  (via drill 0.3)
  Top 0.254: R20.2 v27.18,68.33
  Bottom 0.254: v27.18,68.33 26.92,68.07 JP55.1
N$21
  Top 0.254: D7.A 8.55,65.62 R21.1
N$22  (via drill 0.3)
  Top 0.254: R22.2 v50.55,68.33
  Bottom 0.254: v50.55,68.33 50.8,68.07 JP64.3
N$23  (via drill 0.3)
  Top 0.254: R23.2 v53.09,68.33
  Bottom 0.254: v53.09,68.33 52.83,68.07 JP64.1
N$24
  Top 0.254: D8.A 34.46,65.62 R24.1
N$25  (via drill 0.3)
  Top 0.254: R25.2 v76.45,68.33
  Bottom 0.254: v76.45,68.33 76.71,68.07 JP73.3
N$26  (via drill 0.3)
  Top 0.254: R26.2 v78.99,68.33
  Bottom 0.254: v78.99,68.33 78.74,68.07 JP73.1
N$27
  Top 0.254: D9.A 60.36,65.62 R27.1
SCL  (via drill 0.3)
  Top 0.152: J4.4 v13.8,18.06 | J2.4 25.69,21.06 v25.46,20.83 | v25.91,11.94 25.91,12.36 R2.1
  Bottom 0.152: v13.8,18.06 18.14,18.06 U1.SCL 20.45,15.75 22.1,15.75 | v25.46,20.83 23.37,18.73 23.37,17.02 22.1,15.75 | J3.4 23.37,9.4 24.64,10.67 | 24.64,10.67 v25.91,11.94 | 22.1,15.75 22.1,13.21 24.64,10.67
SCL1  (via drill 0.3)
  Top 0.152: J6.4 v39.71,18.06 | J1.4 51.6,21.06 v51.37,20.83 | v51.82,11.94 51.82,12.36 R5.1
  Bottom 0.152: v39.71,18.06 44.05,18.06 U2.SCL 46.36,15.75 48.01,15.75 | v51.37,20.83 49.28,18.73 49.28,17.02 48.01,15.75 | J5.4 49.28,9.4 50.55,10.67 | 50.55,10.67 v51.82,11.94 | 48.01,15.75 48.01,13.21 50.55,10.67
SCL2  (via drill 0.3)
  Top 0.152: J9.4 v65.62,18.06 | J7.4 77.51,21.06 v77.28,20.83 | v77.72,11.94 77.72,12.36 R8.1
  Bottom 0.152: v65.62,18.06 69.95,18.06 U3.SCL 72.26,15.75 73.91,15.75 | v77.28,20.83 75.18,18.73 75.18,17.02 73.91,15.75 | J8.4 75.18,9.4 76.45,10.67 | 76.45,10.67 v77.72,11.94 | 73.91,15.75 73.91,13.21 76.45,10.67
SCL3  (via drill 0.3)
  Top 0.152: J12.4 v13.8,43.97 | J10.4 25.69,46.97 v25.46,46.74 | v25.91,37.85 25.91,38.27 R11.1
  Bottom 0.152: v13.8,43.97 18.14,43.97 U4.SCL 20.45,41.66 22.1,41.66 | v25.46,46.74 23.37,44.64 23.37,42.93 22.1,41.66 | J11.4 23.37,35.31 24.64,36.58 | 24.64,36.58 v25.91,37.85 | 22.1,41.66 22.1,39.12 24.64,36.58
SCL4  (via drill 0.3)
  Top 0.152: J15.4 v39.71,43.97 | J13.4 51.6,46.97 v51.37,46.74 | v51.82,37.85 51.82,38.27 R14.1
  Bottom 0.152: v39.71,43.97 44.05,43.97 U5.SCL 46.36,41.66 48.01,41.66 | v51.37,46.74 49.28,44.64 49.28,42.93 48.01,41.66 | J14.4 49.28,35.31 50.55,36.58 | 50.55,36.58 v51.82,37.85 | 48.01,41.66 48.01,39.12 50.55,36.58
SCL5  (via drill 0.3)
  Top 0.152: J18.4 v65.62,43.97 | J16.4 77.51,46.97 v77.28,46.74 | v77.72,37.85 77.72,38.27 R17.1
  Bottom 0.152: v65.62,43.97 69.95,43.97 U6.SCL 72.26,41.66 73.91,41.66 | v77.28,46.74 75.18,44.64 75.18,42.93 73.91,41.66 | J17.4 75.18,35.31 76.45,36.58 | 76.45,36.58 v77.72,37.85 | 73.91,41.66 73.91,39.12 76.45,36.58
SCL6  (via drill 0.3)
  Top 0.152: J21.4 v13.8,69.87 | J19.4 25.69,72.87 v25.46,72.64 | v25.91,63.75 25.91,64.17 R20.1
  Bottom 0.152: v13.8,69.87 18.14,69.87 U7.SCL 20.45,67.56 22.1,67.56 | v25.46,72.64 23.37,70.55 23.37,68.83 22.1,67.56 | J20.4 23.37,61.21 24.64,62.48 | 24.64,62.48 v25.91,63.75 | 22.1,67.56 22.1,65.02 24.64,62.48
SCL7  (via drill 0.3)
  Top 0.152: J24.4 v39.71,69.87 | J22.4 51.6,72.87 v51.37,72.64 | v51.82,63.75 51.82,64.17 R23.1
  Bottom 0.152: v39.71,69.87 44.05,69.87 U8.SCL 46.36,67.56 48.01,67.56 | v51.37,72.64 49.28,70.55 49.28,68.83 48.01,67.56 | J23.4 49.28,61.21 50.55,62.48 | 50.55,62.48 v51.82,63.75 | 48.01,67.56 48.01,65.02 50.55,62.48
SCL8  (via drill 0.3)
  Top 0.152: J27.4 v65.62,69.87 | J25.4 77.51,72.87 v77.28,72.64 | v77.72,63.75 77.72,64.17 R26.1
  Bottom 0.152: v65.62,69.87 69.95,69.87 U9.SCL 72.26,67.56 73.91,67.56 | v77.28,72.64 75.18,70.55 75.18,68.83 73.91,67.56 | J26.4 75.18,61.21 76.45,62.48 | 76.45,62.48 v77.72,63.75 | 73.91,67.56 73.91,65.02 76.45,62.48
SDA  (via drill 0.3)
  Top 0.152: J4.3 v13.79,19.06 | J2.3 22.98,20.06 v22.67,19.75 | U1.SDA 21.62,16.64 22.94,15.32 | 22.94,15.32 R1.1 | J3.3 20.83,13.21 22.94,15.32
  Bottom 0.152: v13.79,19.06 21.62,19.06 | 21.62,19.06 21.98,19.06 v22.67,19.75 | U1.SDA 21.62,19.06
SDA1  (via drill 0.3)
  Top 0.152: J6.3 v39.7,19.06 | J1.3 48.89,20.06 v48.58,19.75 | U2.SDA 47.53,16.64 48.85,15.32 | 48.85,15.32 R4.1 | J5.3 46.74,13.21 48.85,15.32
  Bottom 0.152: v39.7,19.06 47.53,19.06 | 47.53,19.06 47.89,19.06 v48.58,19.75 | U2.SDA 47.53,19.06
SDA2  (via drill 0.3)
  Top 0.152: J9.3 v65.6,19.06 | J7.3 74.8,20.06 v74.48,19.75 | U3.SDA 73.44,16.64 74.76,15.32 | 74.76,15.32 R7.1 | J8.3 72.64,13.21 74.76,15.32
  Bottom 0.152: v65.6,19.06 73.44,19.06 | 73.44,19.06 73.8,19.06 v74.48,19.75 | U3.SDA 73.44,19.06
SDA3  (via drill 0.3)
  Top 0.152: J12.3 v13.79,44.97 | J10.3 22.98,45.97 v22.67,45.66 | U4.SDA 21.62,42.55 22.94,41.23 | 22.94,41.23 R10.1 | J11.3 20.83,39.12 22.94,41.23
  Bottom 0.152: v13.79,44.97 21.62,44.97 | 21.62,44.97 21.98,44.97 v22.67,45.66 | U4.SDA 21.62,44.97
SDA4  (via drill 0.3)
  Top 0.152: J15.3 v39.7,44.97 | J13.3 48.89,45.97 v48.58,45.66 | U5.SDA 47.53,42.55 48.85,41.23 | 48.85,41.23 R13.1 | J14.3 46.74,39.12 48.85,41.23
  Bottom 0.152: v39.7,44.97 47.53,44.97 | 47.53,44.97 47.89,44.97 v48.58,45.66 | U5.SDA 47.53,44.97
SDA5  (via drill 0.3)
  Top 0.152: J18.3 v65.6,44.97 | J16.3 74.8,45.97 v74.48,45.66 | U6.SDA 73.44,42.55 74.76,41.23 | 74.76,41.23 R16.1 | J17.3 72.64,39.12 74.76,41.23
  Bottom 0.152: v65.6,44.97 73.44,44.97 | 73.44,44.97 73.8,44.97 v74.48,45.66 | U6.SDA 73.44,44.97
SDA6  (via drill 0.3)
  Top 0.152: J21.3 v13.79,70.87 | J19.3 22.98,71.87 v22.67,71.56 | U7.SDA 21.62,68.46 22.94,67.14 | 22.94,67.14 R19.1 | J20.3 20.83,65.02 22.94,67.14
  Bottom 0.152: v13.79,70.87 21.62,70.87 | 21.62,70.87 21.98,70.87 v22.67,71.56 | U7.SDA 21.62,70.87
SDA7  (via drill 0.3)
  Top 0.152: J24.3 v39.7,70.87 | J22.3 48.89,71.87 v48.58,71.56 | U8.SDA 47.53,68.46 48.85,67.14 | 48.85,67.14 R22.1 | J23.3 46.74,65.02 48.85,67.14
  Bottom 0.152: v39.7,70.87 47.53,70.87 | 47.53,70.87 47.89,70.87 v48.58,71.56 | U8.SDA 47.53,70.87
SDA8  (via drill 0.3)
  Top 0.152: J27.3 v65.6,70.87 | J25.3 74.8,71.87 v74.48,71.56 | U9.SDA 73.44,68.46 74.76,67.14 | 74.76,67.14 R25.1 | J26.3 72.64,65.02 74.76,67.14
  Bottom 0.152: v65.6,70.87 73.44,70.87 | 73.44,70.87 73.8,70.87 v74.48,71.56 | U9.SDA 73.44,70.87

## Text on the board
Bottom: X01 | X01 | X01 | X01 | X01 | X01 | X01 | X01 | X01
Milling: v-score | v-score | v-score | v-score | v-score | v-score | v-score | v-score